# Altium PCB CH569W-R0-1v0.PcbDoc (part 3 of 4)
Units mil, origin at the board's own origin, x right, y up, seen from the top; angles counter-clockwise.
Board outline 3674 x 3156.46 mil, 4 copper layers (Top Layer, Mid-Layer 1, Mid-Layer 2, Bottom Layer); 78 components, 99 nets, 392 pads, 683 vias.
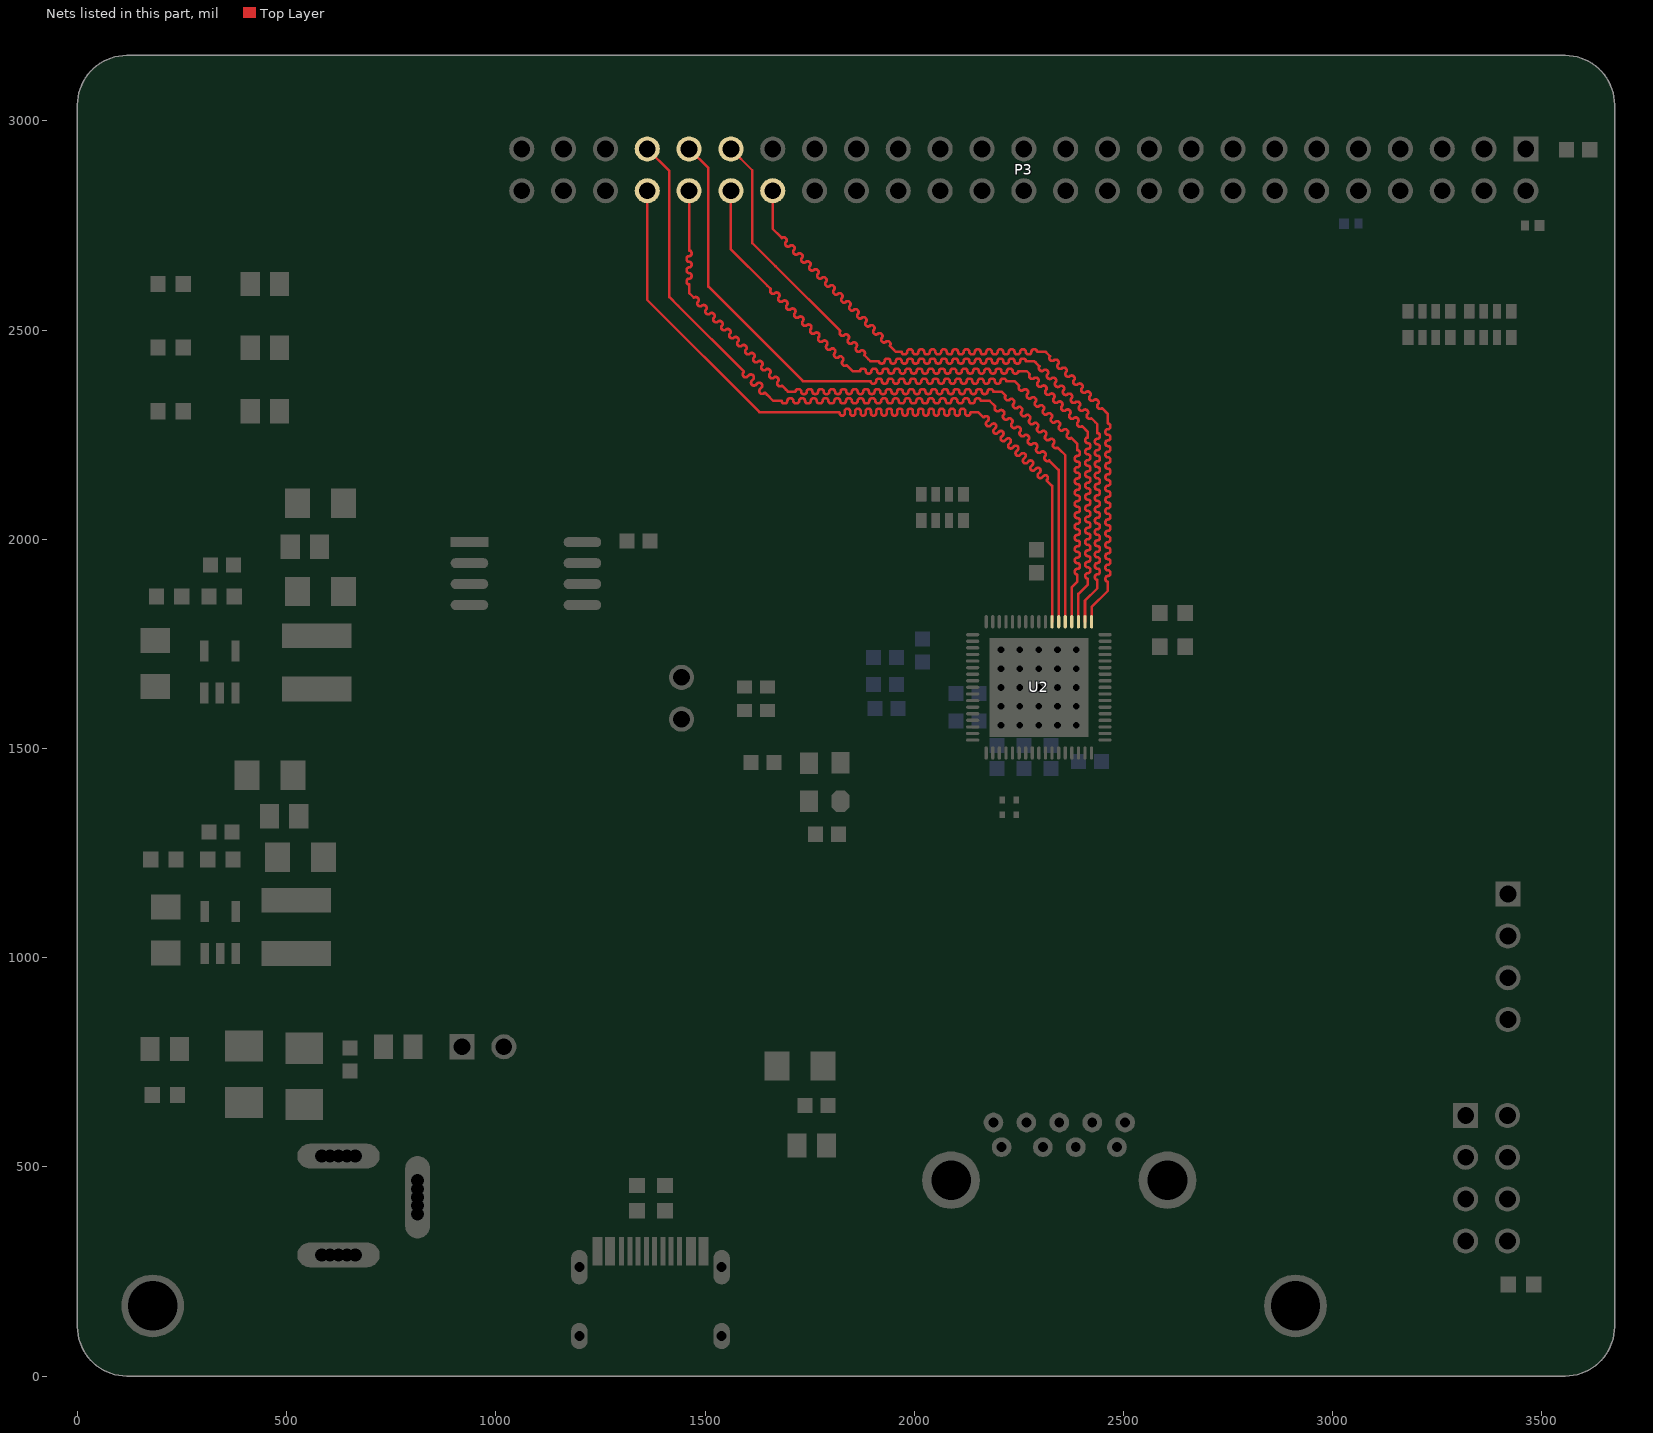
[diagram p5: the nets of this part, all layers, seen from the top]

## Via types
v1: diameter 17.72, hole 7.87, Top Layer to Bottom Layer, tented both sides, 350 vias
v2: diameter 28, hole 15, Top Layer to Bottom Layer, tented both sides, 141 vias
v3: diameter 28, hole 16, Top Layer to Bottom Layer, tented both sides, 104 vias
v4: diameter 24, hole 12, Top Layer to Bottom Layer, tented both sides, 85 vias
v5: diameter 30, hole 18, Top Layer to Bottom Layer, tented both sides, 3 vias

## Nets (pads, with @x,y where several pads share a name; then routed paths per layer and width w, separated by ;. In a path a pad name is that pad's centre, name@x,y a point inside that pad or via, vN(x,y) a via of type N, cw(c..) or ccw(c..) an arc to the next point about the centre after c; other vN are vias at no path point) (continued)
HD19: P3.38 U2.35 | length 2218
  Top Layer w6: P3.38@1662,2833 1662,2742 1680,2724 1683.94,2720.06 cw(c1688.18,2715.82) 1692.43,2720.06 1693.49,2719 cw(c1689.24,2714.76) 1693.49,2710.51 ccw(c1697.73,2706.27) 1693.49,2702.03 1694.55,2700.97 ccw(c1698.79,2705.21) 1703.03,2700.97 cw(c1707.28,2696.72) 1711.52,2700.97 1712.58,2699.91 cw(c1708.34,2695.66) 1712.58,2691.42 ccw(c1716.82,2687.18) 1712.58,2682.94 1713.64,2681.88 ccw(c1717.88,2686.12) 1722.12,2681.88 cw(c1726.37,2677.63) 1730.61,2681.88 1731.67,2680.81 cw(c1727.43,2676.57) 1731.67,2672.33 ccw(c1735.91,2668.09) 1731.67,2663.84 1732.73,2662.78 ccw(c1736.97,2667.03) 1741.22,2662.78 cw(c1745.46,2658.54) 1749.7,2662.78 1750.76,2661.72 cw(c1746.52,2657.48) 1750.76,2653.24 ccw(c1755,2649) 1750.76,2644.75 1751.82,2643.69 ccw(c1756.07,2647.93) 1760.31,2643.69 cw(c1764.55,2639.45) 1768.79,2643.69 1769.85,2642.63 cw(c1765.61,2638.39) 1769.85,2634.15 ccw(c1774.1,2629.9) 1769.85,2625.66 1770.91,2624.6 ccw(c1775.16,2628.84) 1779.4,2624.6 cw(c1783.64,2620.36) 1787.89,2624.6 1788.95,2623.54 cw(c1784.7,2619.3) 1788.95,2615.05 ccw(c1793.19,2610.81) 1788.95,2606.57 1790.01,2605.51 ccw(c1794.25,2609.75) 1798.49,2605.51 cw(c1802.73,2601.27) 1806.98,2605.51 1808.04,2604.45 cw(c1803.8,2600.2) 1808.04,2595.96 ccw(c1812.28,2591.72) 1808.04,2587.48 1809.1,2586.42 ccw(c1813.34,2590.66) 1817.58,2586.42 cw(c1821.83,2582.17) 1826.07,2586.42 1827.13,2585.36 cw(c1822.89,2581.11) 1827.13,2576.87 ccw(c1831.37,2572.63) 1827.13,2568.38 1828.19,2567.32 ccw(c1832.43,2571.57) 1836.68,2567.32 cw(c1840.92,2563.08) 1845.16,2567.32 1846.22,2566.26 cw(c1841.98,2562.02) 1846.22,2557.78 ccw(c1850.46,2553.54) 1846.22,2549.29 1847.28,2548.23 ccw(c1851.52,2552.48) 1855.77,2548.23 cw(c1860.01,2543.99) 1864.25,2548.23 1865.31,2547.17 cw(c1861.07,2542.93) 1865.31,2538.69 ccw(c1869.56,2534.44) 1865.31,2530.2 1866.37,2529.14 ccw(c1870.62,2533.38) 1874.86,2529.14 cw(c1879.1,2524.9) 1883.34,2529.14 1884.41,2528.08 cw(c1880.16,2523.84) 1884.41,2519.59 ccw(c1888.65,2515.35) 1884.41,2511.11 1885.47,2510.05 ccw(c1889.71,2514.29) 1893.95,2510.05 cw(c1898.19,2505.81) 1902.44,2510.05 1903.5,2508.99 cw(c1899.25,2504.75) 1903.5,2500.5 ccw(c1907.74,2496.26) 1903.5,2492.02 1904.56,2490.96 ccw(c1908.8,2495.2) 1913.04,2490.96 cw(c1917.29,2486.71) 1921.53,2490.96 1922.59,2489.9 cw(c1918.35,2485.65) 1922.59,2481.41 ccw(c1926.83,2477.17) 1922.59,2472.93 1923.65,2471.86 ccw(c1927.89,2476.11) 1932.14,2471.86 cw(c1936.38,2467.62) 1940.62,2471.86 1941.68,2470.8 cw(c1937.44,2466.56) 1941.68,2462.32 1951.23,2452.77 1956,2448 1956.25,2448 1969.75,2448 ccw(c1975.75,2448) 1975.75,2442 1977.25,2442 ccw(c1977.25,2448) 1983.25,2448 cw(c1989.25,2448) 1989.25,2454 1990.75,2454 cw(c1990.75,2448) 1996.75,2448 ccw(c2002.75,2448) 2002.75,2442 2004.25,2442 ccw(c2004.25,2448) 2010.25,2448 cw(c2016.25,2448) 2016.25,2454 2017.75,2454 cw(c2017.75,2448) 2023.75,2448 ccw(c2029.75,2448) 2029.75,2442 2031.25,2442 ccw(c2031.25,2448) 2037.25,2448 cw(c2043.25,2448) 2043.25,2454 2044.75,2454 cw(c2044.75,2448) 2050.75,2448 ccw(c2056.75,2448) 2056.75,2442 2058.25,2442 ccw(c2058.25,2448) 2064.25,2448 cw(c2070.25,2448) 2070.25,2454 2071.75,2454 cw(c2071.75,2448) 2077.75,2448 ccw(c2083.75,2448) 2083.75,2442 2085.25,2442 ccw(c2085.25,2448) 2091.25,2448 cw(c2097.25,2448) 2097.25,2454 2098.75,2454 cw(c2098.75,2448) 2104.75,2448 ccw(c2110.75,2448) 2110.75,2442 2112.25,2442 ccw(c2112.25,2448) 2118.25,2448 cw(c2124.25,2448) 2124.25,2454 2125.75,2454 cw(c2125.75,2448) 2131.75,2448 ccw(c2137.75,2448) 2137.75,2442 2139.25,2442 ccw(c2139.25,2448) 2145.25,2448 cw(c2151.25,2448) 2151.25,2454 2152.75,2454 cw(c2152.75,2448) 2158.75,2448 ccw(c2164.75,2448) 2164.75,2442 2166.25,2442 ccw(c2166.25,2448) 2172.25,2448 cw(c2178.25,2448) 2178.25,2454 2179.75,2454 cw(c2179.75,2448) 2185.75,2448 ccw(c2191.75,2448) 2191.75,2442 2193.25,2442 ccw(c2193.25,2448) 2199.25,2448 cw(c2205.25,2448) 2205.25,2454 2206.75,2454 cw(c2206.75,2448) 2212.75,2448 ccw(c2218.75,2448) 2218.75,2442 2220.25,2442 ccw(c2220.25,2448) 2226.25,2448 cw(c2232.25,2448) 2232.25,2454 2233.75,2454 cw(c2233.75,2448) 2239.75,2448 ccw(c2245.75,2448) 2245.75,2442 2247.25,2442 ccw(c2247.25,2448) 2253.25,2448 cw(c2259.25,2448) 2259.25,2454 2260.75,2454 cw(c2260.75,2448) 2266.75,2448 ccw(c2272.75,2448) 2272.75,2442 2274.25,2442 ccw(c2274.25,2448) 2280.25,2448 cw(c2286.25,2448) 2286.25,2454 2287.75,2454 cw(c2287.75,2448) 2293.75,2448 2307.25,2448 2314,2448 2315.04,2446.96 2324.58,2437.42 ccw(c2328.83,2433.17) 2324.58,2428.93 2325.64,2427.87 ccw(c2329.89,2432.11) 2334.13,2427.87 cw(c2338.37,2423.63) 2342.62,2427.87 2343.68,2426.81 cw(c2339.43,2422.57) 2343.68,2418.32 ccw(c2347.92,2414.08) 2343.68,2409.84 2344.74,2408.78 ccw(c2348.98,2413.02) 2353.22,2408.78 cw(c2357.46,2404.54) 2361.71,2408.78 2362.77,2407.72 cw(c2358.52,2403.48) 2362.77,2399.23 ccw(c2367.01,2394.99) 2362.77,2390.75 2363.83,2389.69 ccw(c2368.07,2393.93) 2372.31,2389.69 cw(c2376.56,2385.44) 2380.8,2389.69 2381.86,2388.63 cw(c2377.62,2384.38) 2381.86,2380.14 ccw(c2386.1,2375.9) 2381.86,2371.66 2382.92,2370.59 ccw(c2387.16,2374.84) 2391.41,2370.59 cw(c2395.65,2366.35) 2399.89,2370.59 2400.95,2369.53 cw(c2396.71,2365.29) 2400.95,2361.05 ccw(c2405.19,2356.81) 2400.95,2352.56 2402.01,2351.5 ccw(c2406.25,2355.75) 2410.5,2351.5 cw(c2414.74,2347.26) 2418.98,2351.5 2420.04,2350.44 cw(c2415.8,2346.2) 2420.04,2341.96 ccw(c2424.29,2337.71) 2420.04,2333.47 2421.1,2332.41 ccw(c2425.35,2336.65) 2429.59,2332.41 cw(c2433.83,2328.17) 2438.07,2332.41 2439.14,2331.35 cw(c2434.89,2327.11) 2439.14,2322.86 ccw(c2443.38,2318.62) 2439.14,2314.38 2440.2,2313.32 ccw(c2444.44,2317.56) 2448.68,2313.32 2458.23,2303.77 2463,2299 2463,2290.25 2463,2276.75 cw(c2463,2270.75) 2469,2270.75 2469,2269.25 cw(c2463,2269.25) 2463,2263.25 ccw(c2463,2257.25) 2457,2257.25 2457,2255.75 ccw(c2463,2255.75) 2463,2249.75 cw(c2463,2243.75) 2469,2243.75 2469,2242.25 cw(c2463,2242.25) 2463,2236.25 ccw(c2463,2230.25) 2457,2230.25 2457,2228.75 ccw(c2463,2228.75) 2463,2222.75 cw(c2463,2216.75) 2469,2216.75 2469,2215.25 cw(c2463,2215.25) 2463,2209.25 ccw(c2463,2203.25) 2457,2203.25 2457,2201.75 ccw(c2463,2201.75) 2463,2195.75 cw(c2463,2189.75) 2469,2189.75 2469,2188.25 cw(c2463,2188.25) 2463,2182.25 ccw(c2463,2176.25) 2457,2176.25 2457,2174.75 ccw(c2463,2174.75) 2463,2168.75 cw(c2463,2162.75) 2469,2162.75 2469,2161.25 cw(c2463,2161.25) 2463,2155.25 ccw(c2463,2149.25) 2457,2149.25 2457,2147.75 ccw(c2463,2147.75) 2463,2141.75 cw(c2463,2135.75) 2469,2135.75 2469,2134.25 cw(c2463,2134.25) 2463,2128.25 ccw(c2463,2122.25) 2457,2122.25 2457,2120.75 ccw(c2463,2120.75) 2463,2114.75 cw(c2463,2108.75) 2469,2108.75 2469,2107.25 cw(c2463,2107.25) 2463,2101.25 ccw(c2463,2095.25) 2457,2095.25 2457,2093.75 ccw(c2463,2093.75) 2463,2087.75 cw(c2463,2081.75) 2469,2081.75 2469,2080.25 cw(c2463,2080.25) 2463,2074.25 ccw(c2463,2068.25) 2457,2068.25 2457,2066.75 ccw(c2463,2066.75) 2463,2060.75 cw(c2463,2054.75) 2469,2054.75 2469,2053.25 cw(c2463,2053.25) 2463,2047.25 ccw(c2463,2041.25) 2457,2041.25 2457,2039.75 ccw(c2463,2039.75) 2463,2033.75 cw(c2463,2027.75) 2469,2027.75 2469,2026.25 cw(c2463,2026.25) 2463,2020.25 ccw(c2463,2014.25) 2457,2014.25 2457,2012.75 ccw(c2463,2012.75) 2463,2006.75 cw(c2463,2000.75) 2469,2000.75 2469,1999.25 cw(c2463,1999.25) 2463,1993.25 ccw(c2463,1987.25) 2457,1987.25 2457,1985.75 ccw(c2463,1985.75) 2463,1979.75 cw(c2463,1973.75) 2469,1973.75 2469,1972.25 cw(c2463,1972.25) 2463,1966.25 ccw(c2463,1960.25) 2457,1960.25 2457,1958.75 ccw(c2463,1958.75) 2463,1952.75 cw(c2463,1946.75) 2469,1946.75 2469,1945.25 cw(c2463,1945.25) 2463,1939.25 ccw(c2463,1933.25) 2457,1933.25 2457,1931.75 ccw(c2463,1931.75) 2463,1925.75 cw(c2463,1919.75) 2469,1919.75 2469,1918.25 cw(c2463,1918.25) 2463,1912.25 ccw(c2463,1906.25) 2457,1906.25 2457,1904.75 ccw(c2463,1904.75) 2463,1898.75 2463,1892 2463,1877 2423.98,1837.98 U2.35@2423.98,1802.78
HD20: P3.39 U2.36 | length 2221.3
  Top Layer w6: P3.39@1562,2933 1613,2882 1613,2708 1668.5,2652.5 1823.41,2497.59 ccw(c1827.65,2493.35) 1823.41,2489.11 1824.47,2488.05 ccw(c1828.71,2492.29) 1832.95,2488.05 cw(c1837.19,2483.81) 1841.44,2488.05 1842.5,2486.99 cw(c1838.25,2482.75) 1842.5,2478.5 ccw(c1846.74,2474.26) 1842.5,2470.02 1843.56,2468.96 ccw(c1847.8,2473.2) 1852.04,2468.96 cw(c1856.29,2464.71) 1860.53,2468.96 1861.59,2467.9 cw(c1857.35,2463.65) 1861.59,2459.41 ccw(c1865.83,2455.17) 1861.59,2450.93 1862.65,2449.86 ccw(c1866.89,2454.11) 1871.14,2449.86 cw(c1875.38,2445.62) 1879.62,2449.86 1880.68,2448.8 cw(c1876.44,2444.56) 1880.68,2440.32 1890.23,2430.77 1895,2426 1902.25,2426 1915.75,2426 ccw(c1921.75,2426) 1921.75,2420 1923.25,2420 ccw(c1923.25,2426) 1929.25,2426 cw(c1935.25,2426) 1935.25,2432 1936.75,2432 cw(c1936.75,2426) 1942.75,2426 ccw(c1948.75,2426) 1948.75,2420 1950.25,2420 ccw(c1950.25,2426) 1956.25,2426 cw(c1962.25,2426) 1962.25,2432 1963.75,2432 cw(c1963.75,2426) 1969.75,2426 ccw(c1975.75,2426) 1975.75,2420 1977.25,2420 ccw(c1977.25,2426) 1983.25,2426 cw(c1989.25,2426) 1989.25,2432 1990.75,2432 cw(c1990.75,2426) 1996.75,2426 ccw(c2002.75,2426) 2002.75,2420 2004.25,2420 ccw(c2004.25,2426) 2010.25,2426 cw(c2016.25,2426) 2016.25,2432 2017.75,2432 cw(c2017.75,2426) 2023.75,2426 ccw(c2029.75,2426) 2029.75,2420 2031.25,2420 ccw(c2031.25,2426) 2037.25,2426 cw(c2043.25,2426) 2043.25,2432 2044.75,2432 cw(c2044.75,2426) 2050.75,2426 ccw(c2056.75,2426) 2056.75,2420 2058.25,2420 ccw(c2058.25,2426) 2064.25,2426 cw(c2070.25,2426) 2070.25,2432 2071.75,2432 cw(c2071.75,2426) 2077.75,2426 ccw(c2083.75,2426) 2083.75,2420 2085.25,2420 ccw(c2085.25,2426) 2091.25,2426 cw(c2097.25,2426) 2097.25,2432 2098.75,2432 cw(c2098.75,2426) 2104.75,2426 ccw(c2110.75,2426) 2110.75,2420 2112.25,2420 ccw(c2112.25,2426) 2118.25,2426 cw(c2124.25,2426) 2124.25,2432 2125.75,2432 cw(c2125.75,2426) 2131.75,2426 ccw(c2137.75,2426) 2137.75,2420 2139.25,2420 ccw(c2139.25,2426) 2145.25,2426 cw(c2151.25,2426) 2151.25,2432 2152.75,2432 cw(c2152.75,2426) 2158.75,2426 ccw(c2164.75,2426) 2164.75,2420 2166.25,2420 ccw(c2166.25,2426) 2172.25,2426 cw(c2178.25,2426) 2178.25,2432 2179.75,2432 cw(c2179.75,2426) 2185.75,2426 ccw(c2191.75,2426) 2191.75,2420 2193.25,2420 ccw(c2193.25,2426) 2199.25,2426 cw(c2205.25,2426) 2205.25,2432 2206.75,2432 cw(c2206.75,2426) 2212.75,2426 ccw(c2218.75,2426) 2218.75,2420 2220.25,2420 ccw(c2220.25,2426) 2226.25,2426 cw(c2232.25,2426) 2232.25,2432 2233.75,2432 cw(c2233.75,2426) 2239.75,2426 ccw(c2245.75,2426) 2245.75,2420 2247.25,2420 ccw(c2247.25,2426) 2253.25,2426 cw(c2259.25,2426) 2259.25,2432 2260.75,2432 cw(c2260.75,2426) 2266.75,2426 2280.25,2426 2287,2426 2290.04,2422.96 2299.58,2413.42 ccw(c2303.83,2409.17) 2299.58,2404.93 2300.64,2403.87 ccw(c2304.89,2408.11) 2309.13,2403.87 cw(c2313.37,2399.63) 2317.62,2403.87 2318.68,2402.81 cw(c2314.43,2398.57) 2318.68,2394.32 ccw(c2322.92,2390.08) 2318.68,2385.84 2319.74,2384.78 ccw(c2323.98,2389.02) 2328.22,2384.78 cw(c2332.46,2380.54) 2336.71,2384.78 2337.77,2383.72 cw(c2333.52,2379.48) 2337.77,2375.23 ccw(c2342.01,2370.99) 2337.77,2366.75 2338.83,2365.69 ccw(c2343.07,2369.93) 2347.31,2365.69 cw(c2351.56,2361.44) 2355.8,2365.69 2356.86,2364.63 cw(c2352.62,2360.38) 2356.86,2356.14 ccw(c2361.1,2351.9) 2356.86,2347.66 2357.92,2346.59 ccw(c2362.16,2350.84) 2366.41,2346.59 cw(c2370.65,2342.35) 2374.89,2346.59 2375.95,2345.53 cw(c2371.71,2341.29) 2375.95,2337.05 ccw(c2380.19,2332.81) 2375.95,2328.56 2377.01,2327.5 ccw(c2381.25,2331.75) 2385.5,2327.5 cw(c2389.74,2323.26) 2393.98,2327.5 2395.04,2326.44 cw(c2390.8,2322.2) 2395.04,2317.96 ccw(c2399.29,2313.71) 2395.04,2309.47 2396.1,2308.41 ccw(c2400.35,2312.65) 2404.59,2308.41 cw(c2408.83,2304.17) 2413.07,2308.41 2414.14,2307.35 cw(c2409.89,2303.11) 2414.14,2298.86 ccw(c2418.38,2294.62) 2414.14,2290.38 2415.2,2289.32 ccw(c2419.44,2293.56) 2423.68,2289.32 2433.23,2279.77 2438,2275 2438,2267.25 2438,2253.75 cw(c2438,2247.75) 2444,2247.75 2444,2246.25 cw(c2438,2246.25) 2438,2240.25 ccw(c2438,2234.25) 2432,2234.25 2432,2232.75 ccw(c2438,2232.75) 2438,2226.75 cw(c2438,2220.75) 2444,2220.75 2444,2219.25 cw(c2438,2219.25) 2438,2213.25 ccw(c2438,2207.25) 2432,2207.25 2432,2205.75 ccw(c2438,2205.75) 2438,2199.75 cw(c2438,2193.75) 2444,2193.75 2444,2192.25 cw(c2438,2192.25) 2438,2186.25 ccw(c2438,2180.25) 2432,2180.25 2432,2178.75 ccw(c2438,2178.75) 2438,2172.75 cw(c2438,2166.75) 2444,2166.75 2444,2165.25 cw(c2438,2165.25) 2438,2159.25 ccw(c2438,2153.25) 2432,2153.25 2432,2151.75 ccw(c2438,2151.75) 2438,2145.75 cw(c2438,2139.75) 2444,2139.75 2444,2138.25 cw(c2438,2138.25) 2438,2132.25 ccw(c2438,2126.25) 2432,2126.25 2432,2124.75 ccw(c2438,2124.75) 2438,2118.75 cw(c2438,2112.75) 2444,2112.75 2444,2111.25 cw(c2438,2111.25) 2438,2105.25 ccw(c2438,2099.25) 2432,2099.25 2432,2097.75 ccw(c2438,2097.75) 2438,2091.75 cw(c2438,2085.75) 2444,2085.75 2444,2084.25 cw(c2438,2084.25) 2438,2078.25 ccw(c2438,2072.25) 2432,2072.25 2432,2070.75 ccw(c2438,2070.75) 2438,2064.75 cw(c2438,2058.75) 2444,2058.75 2444,2057.25 cw(c2438,2057.25) 2438,2051.25 ccw(c2438,2045.25) 2432,2045.25 2432,2043.75 ccw(c2438,2043.75) 2438,2037.75 cw(c2438,2031.75) 2444,2031.75 2444,2030.25 cw(c2438,2030.25) 2438,2024.25 ccw(c2438,2018.25) 2432,2018.25 2432,2016.75 ccw(c2438,2016.75) 2438,2010.75 cw(c2438,2004.75) 2444,2004.75 2444,2003.25 cw(c2438,2003.25) 2438,1997.25 ccw(c2438,1991.25) 2432,1991.25 2432,1989.75 ccw(c2438,1989.75) 2438,1983.75 cw(c2438,1977.75) 2444,1977.75 2444,1976.25 cw(c2438,1976.25) 2438,1970.25 ccw(c2438,1964.25) 2432,1964.25 2432,1962.75 ccw(c2438,1962.75) 2438,1956.75 cw(c2438,1950.75) 2444,1950.75 2444,1949.25 cw(c2438,1949.25) 2438,1943.25 ccw(c2438,1937.25) 2432,1937.25 2432,1935.75 ccw(c2438,1935.75) 2438,1929.75 cw(c2438,1923.75) 2444,1923.75 2444,1922.25 cw(c2438,1922.25) 2438,1916.25 ccw(c2438,1910.25) 2432,1910.25 2432,1908.75 ccw(c2438,1908.75) 2438,1902.75 2438,1896 2438,1883 2408.24,1853.24 U2.36@2408.24,1802.78
HD21: P3.40 U2.37 | length 2218.8
  Top Layer w6: P3.40@1562,2833 1562,2693 1649,2606 1657.31,2597.69 ccw(c1661.55,2593.45) 1657.31,2589.21 1658.37,2588.15 ccw(c1662.61,2592.39) 1666.85,2588.15 cw(c1671.1,2583.9) 1675.34,2588.15 1676.4,2587.09 cw(c1672.16,2582.84) 1676.4,2578.6 ccw(c1680.64,2574.36) 1676.4,2570.11 1677.46,2569.05 ccw(c1681.7,2573.3) 1685.95,2569.05 cw(c1690.19,2564.81) 1694.43,2569.05 1695.49,2567.99 cw(c1691.25,2563.75) 1695.49,2559.51 ccw(c1699.73,2555.27) 1695.49,2551.02 1696.55,2549.96 ccw(c1700.8,2554.2) 1705.04,2549.96 cw(c1709.28,2545.72) 1713.52,2549.96 1714.58,2548.9 cw(c1710.34,2544.66) 1714.58,2540.42 ccw(c1718.83,2536.17) 1714.58,2531.93 1715.64,2530.87 ccw(c1719.89,2535.11) 1724.13,2530.87 cw(c1728.37,2526.63) 1732.62,2530.87 1733.68,2529.81 cw(c1729.43,2525.57) 1733.68,2521.32 ccw(c1737.92,2517.08) 1733.68,2512.84 1734.74,2511.78 ccw(c1738.98,2516.02) 1743.22,2511.78 cw(c1747.46,2507.54) 1751.71,2511.78 1752.77,2510.72 cw(c1748.53,2506.48) 1752.77,2502.23 ccw(c1757.01,2497.99) 1752.77,2493.75 1753.83,2492.69 ccw(c1758.07,2496.93) 1762.31,2492.69 cw(c1766.56,2488.44) 1770.8,2492.69 1771.86,2491.63 cw(c1767.62,2487.38) 1771.86,2483.14 ccw(c1776.1,2478.9) 1771.86,2474.66 1772.92,2473.59 ccw(c1777.16,2477.84) 1781.41,2473.59 cw(c1785.65,2469.35) 1789.89,2473.59 1790.95,2472.53 cw(c1786.71,2468.29) 1790.95,2464.05 ccw(c1795.19,2459.81) 1790.95,2455.56 1792.01,2454.5 ccw(c1796.25,2458.75) 1800.5,2454.5 cw(c1804.74,2450.26) 1808.98,2454.5 1810.04,2453.44 cw(c1805.8,2449.2) 1810.04,2444.96 ccw(c1814.29,2440.71) 1810.04,2436.47 1811.1,2435.41 ccw(c1815.35,2439.65) 1819.59,2435.41 cw(c1823.83,2431.17) 1828.07,2435.41 1829.14,2434.35 cw(c1824.89,2430.11) 1829.14,2425.86 ccw(c1833.38,2421.62) 1829.14,2417.38 1830.2,2416.32 ccw(c1834.44,2420.56) 1838.68,2416.32 1848.23,2406.77 1853,2402 1857.25,2402 1870.75,2402 cw(c1876.75,2402) 1876.75,2408 1878.25,2408 cw(c1878.25,2402) 1884.25,2402 ccw(c1890.25,2402) 1890.25,2396 1891.75,2396 ccw(c1891.75,2402) 1897.75,2402 cw(c1903.75,2402) 1903.75,2408 1905.25,2408 cw(c1905.25,2402) 1911.25,2402 ccw(c1917.25,2402) 1917.25,2396 1918.75,2396 ccw(c1918.75,2402) 1924.75,2402 cw(c1930.75,2402) 1930.75,2408 1932.25,2408 cw(c1932.25,2402) 1938.25,2402 ccw(c1944.25,2402) 1944.25,2396 1945.75,2396 ccw(c1945.75,2402) 1951.75,2402 cw(c1957.75,2402) 1957.75,2408 1959.25,2408 cw(c1959.25,2402) 1965.25,2402 ccw(c1971.25,2402) 1971.25,2396 1972.75,2396 ccw(c1972.75,2402) 1978.75,2402 cw(c1984.75,2402) 1984.75,2408 1986.25,2408 cw(c1986.25,2402) 1992.25,2402 ccw(c1998.25,2402) 1998.25,2396 1999.75,2396 ccw(c1999.75,2402) 2005.75,2402 cw(c2011.75,2402) 2011.75,2408 2013.25,2408 cw(c2013.25,2402) 2019.25,2402 ccw(c2025.25,2402) 2025.25,2396 2026.75,2396 ccw(c2026.75,2402) 2032.75,2402 cw(c2038.75,2402) 2038.75,2408 2040.25,2408 cw(c2040.25,2402) 2046.25,2402 ccw(c2052.25,2402) 2052.25,2396 2053.75,2396 ccw(c2053.75,2402) 2059.75,2402 cw(c2065.75,2402) 2065.75,2408 2067.25,2408 cw(c2067.25,2402) 2073.25,2402 ccw(c2079.25,2402) 2079.25,2396 2080.75,2396 ccw(c2080.75,2402) 2086.75,2402 cw(c2092.75,2402) 2092.75,2408 2094.25,2408 cw(c2094.25,2402) 2100.25,2402 ccw(c2106.25,2402) 2106.25,2396 2107.75,2396 ccw(c2107.75,2402) 2113.75,2402 cw(c2119.75,2402) 2119.75,2408 2121.25,2408 cw(c2121.25,2402) 2127.25,2402 ccw(c2133.25,2402) 2133.25,2396 2134.75,2396 ccw(c2134.75,2402) 2140.75,2402 cw(c2146.75,2402) 2146.75,2408 2148.25,2408 cw(c2148.25,2402) 2154.25,2402 ccw(c2160.25,2402) 2160.25,2396 2161.75,2396 ccw(c2161.75,2402) 2167.75,2402 cw(c2173.75,2402) 2173.75,2408 2175.25,2408 cw(c2175.25,2402) 2181.25,2402 ccw(c2187.25,2402) 2187.25,2396 2188.75,2396 ccw(c2188.75,2402) 2194.75,2402 cw(c2200.75,2402) 2200.75,2408 2202.25,2408 cw(c2202.25,2402) 2208.25,2402 ccw(c2214.25,2402) 2214.25,2396 2215.75,2396 ccw(c2215.75,2402) 2221.75,2402 cw(c2227.75,2402) 2227.75,2408 2229.25,2408 cw(c2229.25,2402) 2235.25,2402 ccw(c2241.25,2402) 2241.25,2396 2242.75,2396 ccw(c2242.75,2402) 2248.75,2402 2262.25,2402 2269,2402 2276.58,2394.42 ccw(c2280.83,2390.17) 2276.58,2385.93 2277.64,2384.87 ccw(c2281.89,2389.11) 2286.13,2384.87 cw(c2290.37,2380.63) 2294.62,2384.87 2295.68,2383.81 cw(c2291.43,2379.57) 2295.68,2375.32 ccw(c2299.92,2371.08) 2295.68,2366.84 2296.74,2365.78 ccw(c2300.98,2370.02) 2305.22,2365.78 cw(c2309.46,2361.54) 2313.71,2365.78 2314.77,2364.72 cw(c2310.52,2360.47) 2314.77,2356.23 ccw(c2319.01,2351.99) 2314.77,2347.75 2315.83,2346.69 ccw(c2320.07,2350.93) 2324.31,2346.69 cw(c2328.56,2342.44) 2332.8,2346.69 2333.86,2345.63 cw(c2329.62,2341.38) 2333.86,2337.14 ccw(c2338.1,2332.9) 2333.86,2328.66 2334.92,2327.59 ccw(c2339.16,2331.84) 2343.41,2327.59 cw(c2347.65,2323.35) 2351.89,2327.59 2352.95,2326.53 cw(c2348.71,2322.29) 2352.95,2318.05 ccw(c2357.19,2313.81) 2352.95,2309.56 2354.01,2308.5 ccw(c2358.25,2312.75) 2362.5,2308.5 cw(c2366.74,2304.26) 2370.98,2308.5 2372.04,2307.44 cw(c2367.8,2303.2) 2372.04,2298.96 ccw(c2376.29,2294.71) 2372.04,2290.47 2373.1,2289.41 ccw(c2377.35,2293.65) 2381.59,2289.41 cw(c2385.83,2285.17) 2390.07,2289.41 2391.14,2288.35 cw(c2386.89,2284.11) 2391.14,2279.86 ccw(c2395.38,2275.62) 2391.14,2271.38 2392.2,2270.32 ccw(c2396.44,2274.56) 2400.68,2270.32 2410.23,2260.77 2415,2256 2415,2243.25 ccw(c2415,2237.25) 2409,2237.25 2409,2235.75 ccw(c2415,2235.75) 2415,2229.75 cw(c2415,2223.75) 2421,2223.75 2421,2222.25 cw(c2415,2222.25) 2415,2216.25 ccw(c2415,2210.25) 2409,2210.25 2409,2208.75 ccw(c2415,2208.75) 2415,2202.75 cw(c2415,2196.75) 2421,2196.75 2421,2195.25 cw(c2415,2195.25) 2415,2189.25 ccw(c2415,2183.25) 2409,2183.25 2409,2181.75 ccw(c2415,2181.75) 2415,2175.75 cw(c2415,2169.75) 2421,2169.75 2421,2168.25 cw(c2415,2168.25) 2415,2162.25 ccw(c2415,2156.25) 2409,2156.25 2409,2154.75 ccw(c2415,2154.75) 2415,2148.75 cw(c2415,2142.75) 2421,2142.75 2421,2141.25 cw(c2415,2141.25) 2415,2135.25 ccw(c2415,2129.25) 2409,2129.25 2409,2127.75 ccw(c2415,2127.75) 2415,2121.75 cw(c2415,2115.75) 2421,2115.75 2421,2114.25 cw(c2415,2114.25) 2415,2108.25 ccw(c2415,2102.25) 2409,2102.25 2409,2100.75 ccw(c2415,2100.75) 2415,2094.75 cw(c2415,2088.75) 2421,2088.75 2421,2087.25 cw(c2415,2087.25) 2415,2081.25 ccw(c2415,2075.25) 2409,2075.25 2409,2073.75 ccw(c2415,2073.75) 2415,2067.75 cw(c2415,2061.75) 2421,2061.75 2421,2060.25 cw(c2415,2060.25) 2415,2054.25 ccw(c2415,2048.25) 2409,2048.25 2409,2046.75 ccw(c2415,2046.75) 2415,2040.75 cw(c2415,2034.75) 2421,2034.75 2421,2033.25 cw(c2415,2033.25) 2415,2027.25 ccw(c2415,2021.25) 2409,2021.25 2409,2019.75 ccw(c2415,2019.75) 2415,2013.75 cw(c2415,2007.75) 2421,2007.75 2421,2006.25 cw(c2415,2006.25) 2415,2000.25 ccw(c2415,1994.25) 2409,1994.25 2409,1992.75 ccw(c2415,1992.75) 2415,1986.75 cw(c2415,1980.75) 2421,1980.75 2421,1979.25 cw(c2415,1979.25) 2415,1973.25 ccw(c2415,1967.25) 2409,1967.25 2409,1965.75 ccw(c2415,1965.75) 2415,1959.75 cw(c2415,1953.75) 2421,1953.75 2421,1952.25 cw(c2415,1952.25) 2415,1946.25 ccw(c2415,1940.25) 2409,1940.25 2409,1938.75 ccw(c2415,1938.75) 2415,1932.75 cw(c2415,1926.75) 2421,1926.75 2421,1925.25 cw(c2415,1925.25) 2415,1919.25 ccw(c2415,1913.25) 2409,1913.25 2409,1911.75 ccw(c2415,1911.75) 2415,1905.75 2415,1899 2415,1892 2392.49,1869.49 U2.37@2392.49,1802.78
HD22: P3.41 U2.38 | length 2220.6
  Top Layer w6: P3.41@1462,2933 1508,2887 1508,2604 1734,2378 1885,2378 1895.75,2378 ccw(c1901.75,2378) 1901.75,2372 1903.25,2372 ccw(c1903.25,2378) 1909.25,2378 cw(c1915.25,2378) 1915.25,2384 1916.75,2384 cw(c1916.75,2378) 1922.75,2378 ccw(c1928.75,2378) 1928.75,2372 1930.25,2372 ccw(c1930.25,2378) 1936.25,2378 cw(c1942.25,2378) 1942.25,2384 1943.75,2384 cw(c1943.75,2378) 1949.75,2378 ccw(c1955.75,2378) 1955.75,2372 1957.25,2372 ccw(c1957.25,2378) 1963.25,2378 cw(c1969.25,2378) 1969.25,2384 1970.75,2384 cw(c1970.75,2378) 1976.75,2378 ccw(c1982.75,2378) 1982.75,2372 1984.25,2372 ccw(c1984.25,2378) 1990.25,2378 cw(c1996.25,2378) 1996.25,2384 1997.75,2384 cw(c1997.75,2378) 2003.75,2378 ccw(c2009.75,2378) 2009.75,2372 2011.25,2372 ccw(c2011.25,2378) 2017.25,2378 cw(c2023.25,2378) 2023.25,2384 2024.75,2384 cw(c2024.75,2378) 2030.75,2378 ccw(c2036.75,2378) 2036.75,2372 2038.25,2372 ccw(c2038.25,2378) 2044.25,2378 cw(c2050.25,2378) 2050.25,2384 2051.75,2384 cw(c2051.75,2378) 2057.75,2378 ccw(c2063.75,2378) 2063.75,2372 2065.25,2372 ccw(c2065.25,2378) 2071.25,2378 cw(c2077.25,2378) 2077.25,2384 2078.75,2384 cw(c2078.75,2378) 2084.75,2378 ccw(c2090.75,2378) 2090.75,2372 2092.25,2372 ccw(c2092.25,2378) 2098.25,2378 cw(c2104.25,2378) 2104.25,2384 2105.75,2384 cw(c2105.75,2378) 2111.75,2378 ccw(c2117.75,2378) 2117.75,2372 2119.25,2372 ccw(c2119.25,2378) 2125.25,2378 cw(c2131.25,2378) 2131.25,2384 2132.75,2384 cw(c2132.75,2378) 2138.75,2378 ccw(c2144.75,2378) 2144.75,2372 2146.25,2372 ccw(c2146.25,2378) 2152.25,2378 cw(c2158.25,2378) 2158.25,2384 2159.75,2384 cw(c2159.75,2378) 2165.75,2378 ccw(c2171.75,2378) 2171.75,2372 2173.25,2372 ccw(c2173.25,2378) 2179.25,2378 cw(c2185.25,2378) 2185.25,2384 2186.75,2384 cw(c2186.75,2378) 2192.75,2378 ccw(c2198.75,2378) 2198.75,2372 2200.25,2372 ccw(c2200.25,2378) 2206.25,2378 cw(c2212.25,2378) 2212.25,2384 2213.75,2384 cw(c2213.75,2378) 2219.75,2378 2233.25,2378 2240,2378 2242.04,2375.96 2251.58,2366.42 ccw(c2255.83,2362.17) 2251.58,2357.93 2252.64,2356.87 ccw(c2256.89,2361.11) 2261.13,2356.87 cw(c2265.37,2352.63) 2269.62,2356.87 2270.68,2355.81 cw(c2266.43,2351.57) 2270.68,2347.32 ccw(c2274.92,2343.08) 2270.68,2338.84 2271.74,2337.78 ccw(c2275.98,2342.02) 2280.22,2337.78 cw(c2284.46,2333.54) 2288.71,2337.78 2289.77,2336.72 cw(c2285.52,2332.47) 2289.77,2328.23 ccw(c2294.01,2323.99) 2289.77,2319.75 2290.83,2318.69 ccw(c2295.07,2322.93) 2299.31,2318.69 cw(c2303.56,2314.44) 2307.8,2318.69 2308.86,2317.63 cw(c2304.62,2313.38) 2308.86,2309.14 ccw(c2313.1,2304.9) 2308.86,2300.66 2309.92,2299.59 ccw(c2314.16,2303.84) 2318.41,2299.59 cw(c2322.65,2295.35) 2326.89,2299.59 2327.95,2298.53 cw(c2323.71,2294.29) 2327.95,2290.05 ccw(c2332.19,2285.81) 2327.95,2281.56 2329.01,2280.5 ccw(c2333.25,2284.75) 2337.5,2280.5 cw(c2341.74,2276.26) 2345.98,2280.5 2347.04,2279.44 cw(c2342.8,2275.2) 2347.04,2270.96 ccw(c2351.29,2266.71) 2347.04,2262.47 2348.1,2261.41 ccw(c2352.35,2265.65) 2356.59,2261.41 cw(c2360.83,2257.17) 2365.07,2261.41 2366.14,2260.35 cw(c2361.89,2256.11) 2366.14,2251.86 ccw(c2370.38,2247.62) 2366.14,2243.38 2367.2,2242.32 ccw(c2371.44,2246.56) 2375.68,2242.32 2385.23,2232.77 2390,2228 2390,2226.25 2390,2212.75 cw(c2390,2206.75) 2396,2206.75 2396,2205.25 cw(c2390,2205.25) 2390,2199.25 ccw(c2390,2193.25) 2384,2193.25 2384,2191.75 ccw(c2390,2191.75) 2390,2185.75 cw(c2390,2179.75) 2396,2179.75 2396,2178.25 cw(c2390,2178.25) 2390,2172.25 ccw(c2390,2166.25) 2384,2166.25 2384,2164.75 ccw(c2390,2164.75) 2390,2158.75 cw(c2390,2152.75) 2396,2152.75 2396,2151.25 cw(c2390,2151.25) 2390,2145.25 ccw(c2390,2139.25) 2384,2139.25 2384,2137.75 ccw(c2390,2137.75) 2390,2131.75 cw(c2390,2125.75) 2396,2125.75 2396,2124.25 cw(c2390,2124.25) 2390,2118.25 ccw(c2390,2112.25) 2384,2112.25 2384,2110.75 ccw(c2390,2110.75) 2390,2104.75 cw(c2390,2098.75) 2396,2098.75 2396,2097.25 cw(c2390,2097.25) 2390,2091.25 ccw(c2390,2085.25) 2384,2085.25 2384,2083.75 ccw(c2390,2083.75) 2390,2077.75 cw(c2390,2071.75) 2396,2071.75 2396,2070.25 cw(c2390,2070.25) 2390,2064.25 ccw(c2390,2058.25) 2384,2058.25 2384,2056.75 ccw(c2390,2056.75) 2390,2050.75 cw(c2390,2044.75) 2396,2044.75 2396,2043.25 cw(c2390,2043.25) 2390,2037.25 ccw(c2390,2031.25) 2384,2031.25 2384,2029.75 ccw(c2390,2029.75) 2390,2023.75 cw(c2390,2017.75) 2396,2017.75 2396,2016.25 cw(c2390,2016.25) 2390,2010.25 ccw(c2390,2004.25) 2384,2004.25 2384,2002.75 ccw(c2390,2002.75) 2390,1996.75 cw(c2390,1990.75) 2396,1990.75 2396,1989.25 cw(c2390,1989.25) 2390,1983.25 ccw(c2390,1977.25) 2384,1977.25 2384,1975.75 ccw(c2390,1975.75) 2390,1969.75 cw(c2390,1963.75) 2396,1963.75 2396,1962.25 cw(c2390,1962.25) 2390,1956.25 ccw(c2390,1950.25) 2384,1950.25 2384,1948.75 ccw(c2390,1948.75) 2390,1942.75 cw(c2390,1936.75) 2396,1936.75 2396,1935.25 cw(c2390,1935.25) 2390,1929.25 ccw(c2390,1923.25) 2384,1923.25 2384,1921.75 ccw(c2390,1921.75) 2390,1915.75 2390,1909 2390,1899 2376.74,1885.74 U2.38@2376.74,1802.78
HD23: P3.42 U2.39 | length 2222.5
  Top Layer w6: P3.42@1462,2833 1462,2693 1462,2690.25 cw(c1462,2684.25) 1468,2684.25 1468,2682.75 cw(c1462,2682.75) 1462,2676.75 ccw(c1462,2670.75) 1456,2670.75 1456,2669.25 ccw(c1462,2669.25) 1462,2663.25 cw(c1462,2657.25) 1468,2657.25 1468,2655.75 cw(c1462,2655.75) 1462,2649.75 ccw(c1462,2643.75) 1456,2643.75 1456,2642.25 ccw(c1462,2642.25) 1462,2636.25 cw(c1462,2630.25) 1468,2630.25 1468,2628.75 cw(c1462,2628.75) 1462,2622.75 ccw(c1462,2616.75) 1456,2616.75 1456,2615.25 ccw(c1462,2615.25) 1462,2609.25 1462,2595.75 1462,2589 1464.12,2586.88 1473.67,2577.33 cw(c1477.91,2573.09) 1482.16,2577.33 1483.22,2576.27 cw(c1478.97,2572.03) 1483.22,2567.78 ccw(c1487.46,2563.54) 1483.22,2559.3 1484.28,2558.24 ccw(c1488.52,2562.48) 1492.76,2558.24 cw(c1497,2554) 1501.25,2558.24 1502.31,2557.18 cw(c1498.07,2552.93) 1502.31,2548.69 ccw(c1506.55,2544.45) 1502.31,2540.21 1503.37,2539.15 ccw(c1507.61,2543.39) 1511.85,2539.15 cw(c1516.1,2534.9) 1520.34,2539.15 1521.4,2538.09 cw(c1517.16,2533.84) 1521.4,2529.6 ccw(c1525.64,2525.36) 1521.4,2521.11 1522.46,2520.05 ccw(c1526.7,2524.3) 1530.95,2520.05 cw(c1535.19,2515.81) 1539.43,2520.05 1540.49,2518.99 cw(c1536.25,2514.75) 1540.49,2510.51 ccw(c1544.73,2506.27) 1540.49,2502.02 1541.55,2500.96 ccw(c1545.8,2505.2) 1550.04,2500.96 cw(c1554.28,2496.72) 1558.52,2500.96 1559.58,2499.9 cw(c1555.34,2495.66) 1559.58,2491.42 ccw(c1563.83,2487.17) 1559.58,2482.93 1560.64,2481.87 ccw(c1564.89,2486.11) 1569.13,2481.87 cw(c1573.37,2477.63) 1577.62,2481.87 1578.68,2480.81 cw(c1574.43,2476.57) 1578.68,2472.32 ccw(c1582.92,2468.08) 1578.68,2463.84 1579.74,2462.78 ccw(c1583.98,2467.02) 1588.22,2462.78 cw(c1592.46,2458.54) 1596.71,2462.78 1597.77,2461.72 cw(c1593.53,2457.48) 1597.77,2453.23 ccw(c1602.01,2448.99) 1597.77,2444.75 1598.83,2443.69 ccw(c1603.07,2447.93) 1607.31,2443.69 cw(c1611.56,2439.44) 1615.8,2443.69 1616.86,2442.63 cw(c1612.62,2438.38) 1616.86,2434.14 ccw(c1621.1,2429.9) 1616.86,2425.66 1617.92,2424.59 ccw(c1622.16,2428.84) 1626.41,2424.59 cw(c1630.65,2420.35) 1634.89,2424.59 1635.95,2423.53 cw(c1631.71,2419.29) 1635.95,2415.05 ccw(c1640.19,2410.81) 1635.95,2406.56 1637.01,2405.5 ccw(c1641.25,2409.75) 1645.5,2405.5 cw(c1649.74,2401.26) 1653.98,2405.5 1655.04,2404.44 cw(c1650.8,2400.2) 1655.04,2395.96 ccw(c1659.29,2391.71) 1655.04,2387.47 1656.1,2386.41 ccw(c1660.35,2390.65) 1664.59,2386.41 cw(c1668.83,2382.17) 1673.07,2386.41 1674.14,2385.35 cw(c1669.89,2381.11) 1674.14,2376.86 ccw(c1678.38,2372.62) 1674.14,2368.38 1675.2,2367.32 ccw(c1679.44,2371.56) 1683.68,2367.32 1693.23,2357.77 1698,2353 1702.75,2353 1716.25,2353 cw(c1722.25,2353) 1722.25,2359 1723.75,2359 cw(c1723.75,2353) 1729.75,2353 ccw(c1735.75,2353) 1735.75,2347 1737.25,2347 ccw(c1737.25,2353) 1743.25,2353 cw(c1749.25,2353) 1749.25,2359 1750.75,2359 cw(c1750.75,2353) 1756.75,2353 ccw(c1762.75,2353) 1762.75,2347 1764.25,2347 ccw(c1764.25,2353) 1770.25,2353 cw(c1776.25,2353) 1776.25,2359 1777.75,2359 cw(c1777.75,2353) 1783.75,2353 ccw(c1789.75,2353) 1789.75,2347 1791.25,2347 ccw(c1791.25,2353) 1797.25,2353 cw(c1803.25,2353) 1803.25,2359 1804.75,2359 cw(c1804.75,2353) 1810.75,2353 ccw(c1816.75,2353) 1816.75,2347 1818.25,2347 ccw(c1818.25,2353) 1824.25,2353 cw(c1830.25,2353) 1830.25,2359 1831.75,2359 cw(c1831.75,2353) 1837.75,2353 ccw(c1843.75,2353) 1843.75,2347 1845.25,2347 ccw(c1845.25,2353) 1851.25,2353 cw(c1857.25,2353) 1857.25,2359 1858.75,2359 cw(c1858.75,2353) 1864.75,2353 ccw(c1870.75,2353) 1870.75,2347 1872.25,2347 ccw(c1872.25,2353) 1878.25,2353 cw(c1884.25,2353) 1884.25,2359 1885.75,2359 cw(c1885.75,2353) 1891.75,2353 ccw(c1897.75,2353) 1897.75,2347 1899.25,2347 ccw(c1899.25,2353) 1905.25,2353 cw(c1911.25,2353) 1911.25,2359 1912.75,2359 cw(c1912.75,2353) 1918.75,2353 ccw(c1924.75,2353) 1924.75,2347 1926.25,2347 ccw(c1926.25,2353) 1932.25,2353 cw(c1938.25,2353) 1938.25,2359 1939.75,2359 cw(c1939.75,2353) 1945.75,2353 ccw(c1951.75,2353) 1951.75,2347 1953.25,2347 ccw(c1953.25,2353) 1959.25,2353 cw(c1965.25,2353) 1965.25,2359 1966.75,2359 cw(c1966.75,2353) 1972.75,2353 ccw(c1978.75,2353) 1978.75,2347 1980.25,2347 ccw(c1980.25,2353) 1986.25,2353 cw(c1992.25,2353) 1992.25,2359 1993.75,2359 cw(c1993.75,2353) 1999.75,2353 ccw(c2005.75,2353) 2005.75,2347 2007.25,2347 ccw(c2007.25,2353) 2013.25,2353 cw(c2019.25,2353) 2019.25,2359 2020.75,2359 cw(c2020.75,2353) 2026.75,2353 ccw(c2032.75,2353) 2032.75,2347 2034.25,2347 ccw(c2034.25,2353) 2040.25,2353 cw(c2046.25,2353) 2046.25,2359 2047.75,2359 cw(c2047.75,2353) 2053.75,2353 ccw(c2059.75,2353) 2059.75,2347 2061.25,2347 ccw(c2061.25,2353) 2067.25,2353 cw(c2073.25,2353) 2073.25,2359 2074.75,2359 cw(c2074.75,2353) 2080.75,2353 ccw(c2086.75,2353) 2086.75,2347 2088.25,2347 ccw(c2088.25,2353) 2094.25,2353 cw(c2100.25,2353) 2100.25,2359 2101.75,2359 cw(c2101.75,2353) 2107.75,2353 ccw(c2113.75,2353) 2113.75,2347 2115.25,2347 ccw(c2115.25,2353) 2121.25,2353 cw(c2127.25,2353) 2127.25,2359 2128.75,2359 cw(c2128.75,2353) 2134.75,2353 ccw(c2140.75,2353) 2140.75,2347 2142.25,2347 ccw(c2142.25,2353) 2148.25,2353 cw(c2154.25,2353) 2154.25,2359 2155.75,2359 cw(c2155.75,2353) 2161.75,2353 ccw(c2167.75,2353) 2167.75,2347 2169.25,2347 ccw(c2169.25,2353) 2175.25,2353 cw(c2181.25,2353) 2181.25,2359 2182.75,2359 cw(c2182.75,2353) 2188.75,2353 2202.25,2353 2209,2353 2209.08,2352.92 2218.63,2343.37 ccw(c2222.87,2339.13) 2218.63,2334.88 2219.69,2333.82 ccw(c2223.93,2338.07) 2228.18,2333.82 cw(c2232.42,2329.58) 2236.66,2333.82 2237.72,2332.76 cw(c2233.48,2328.52) 2237.72,2324.28 ccw(c2241.96,2320.04) 2237.72,2315.79 2238.78,2314.73 ccw(c2243.02,2318.97) 2247.27,2314.73 cw(c2251.51,2310.49) 2255.75,2314.73 2256.81,2313.67 cw(c2252.57,2309.43) 2256.81,2305.19 ccw(c2261.06,2300.94) 2256.81,2296.7 2257.87,2295.64 ccw(c2262.12,2299.88) 2266.36,2295.64 cw(c2270.6,2291.4) 2274.84,2295.64 2275.91,2294.58 cw(c2271.66,2290.34) 2275.91,2286.09 ccw(c2280.15,2281.85) 2275.91,2277.61 2276.97,2276.55 ccw(c2281.21,2280.79) 2285.45,2276.55 cw(c2289.69,2272.31) 2293.94,2276.55 2295,2275.49 cw(c2290.75,2271.25) 2295,2267 ccw(c2299.24,2262.76) 2295,2258.52 2296.06,2257.46 ccw(c2300.3,2261.7) 2304.54,2257.46 cw(c2308.79,2253.21) 2313.03,2257.46 2314.09,2256.4 cw(c2309.85,2252.15) 2314.09,2247.91 ccw(c2318.33,2243.67) 2314.09,2239.43 2315.15,2238.36 ccw(c2319.39,2242.61) 2323.64,2238.36 cw(c2327.88,2234.12) 2332.12,2238.36 2333.18,2237.3 cw(c2328.94,2233.06) 2333.18,2228.82 ccw(c2337.42,2224.58) 2333.18,2220.33 2334.24,2219.27 ccw(c2338.48,2223.52) 2342.73,2219.27 2347.5,2214.5 2360.99,2201.01 U2.39@2360.99,1802.78
HD24: P3.43 U2.40 | length 2220.5
  Top Layer w6: P3.43@1362,2933 1415,2880 1415,2579 1436,2558 1592.14,2401.86 cw(c1590.72,2400.45) 1592.14,2399.03 ccw(c1597.09,2394.08) 1592.14,2389.13 ccw(c1597.09,2394.08) 1602.04,2389.13 1603.45,2390.55 1604.87,2391.96 cw(c1609.82,2387.01) 1614.77,2391.96 cw(c1609.82,2387.01) 1614.77,2382.06 1613.35,2380.65 1611.94,2379.23 ccw(c1616.89,2374.28) 1611.94,2369.33 ccw(c1616.89,2374.28) 1621.84,2369.33 1623.25,2370.75 1624.67,2372.16 cw(c1629.62,2367.21) 1634.56,2372.16 cw(c1629.62,2367.21) 1634.56,2362.26 1633.15,2360.85 1631.74,2359.43 ccw(c1636.69,2354.49) 1631.74,2349.54 ccw(c1636.69,2354.49) 1641.64,2349.54 cw(c1643.05,2348.12) 1644.46,2349.54 1648,2346 1663,2331 1683,2331 ccw(c1689,2331) 1689,2325 1691,2325 ccw(c1691,2331) 1697,2331 cw(c1703,2331) 1703,2337 1705,2337 cw(c1705,2331) 1711,2331 ccw(c1717,2331) 1717,2325 1719,2325 ccw(c1719,2331) 1725,2331 cw(c1731,2331) 1731,2337 1733,2337 cw(c1733,2331) 1739,2331 ccw(c1745,2331) 1745,2325 1747,2325 ccw(c1747,2331) 1753,2331 cw(c1759,2331) 1759,2337 1761,2337 cw(c1761,2331) 1767,2331 ccw(c1773,2331) 1773,2325 1775,2325 ccw(c1775,2331) 1781,2331 cw(c1787,2331) 1787,2337 1789,2337 cw(c1789,2331) 1795,2331 ccw(c1801,2331) 1801,2325 1803,2325 ccw(c1803,2331) 1809,2331 cw(c1815,2331) 1815,2337 1817,2337 cw(c1817,2331) 1823,2331 ccw(c1829,2331) 1829,2325 1831,2325 ccw(c1831,2331) 1837,2331 cw(c1843,2331) 1843,2337 1845,2337 cw(c1845,2331) 1851,2331 ccw(c1857,2331) 1857,2325 1859,2325 ccw(c1859,2331) 1865,2331 cw(c1871,2331) 1871,2337 1873,2337 cw(c1873,2331) 1879,2331 ccw(c1885,2331) 1885,2325 1887,2325 ccw(c1887,2331) 1893,2331 cw(c1899,2331) 1899,2337 1901,2337 cw(c1901,2331) 1907,2331 ccw(c1913,2331) 1913,2325 1915,2325 ccw(c1915,2331) 1921,2331 cw(c1927,2331) 1927,2337 1929,2337 cw(c1929,2331) 1935,2331 ccw(c1941,2331) 1941,2325 1943,2325 ccw(c1943,2331) 1949,2331 cw(c1955,2331) 1955,2337 1957,2337 cw(c1957,2331) 1963,2331 ccw(c1969,2331) 1969,2325 1971,2325 ccw(c1971,2331) 1977,2331 cw(c1983,2331) 1983,2337 1985,2337 cw(c1985,2331) 1991,2331 ccw(c1997,2331) 1997,2325 1999,2325 ccw(c1999,2331) 2005,2331 cw(c2011,2331) 2011,2337 2013,2337 cw(c2013,2331) 2019,2331 ccw(c2025,2331) 2025,2325 2027,2325 ccw(c2027,2331) 2033,2331 cw(c2039,2331) 2039,2337 2041,2337 cw(c2041,2331) 2047,2331 ccw(c2053,2331) 2053,2325 2055,2325 ccw(c2055,2331) 2061,2331 cw(c2067,2331) 2067,2337 2069,2337 cw(c2069,2331) 2075,2331 ccw(c2081,2331) 2081,2325 2083,2325 ccw(c2083,2331) 2089,2331 cw(c2095,2331) 2095,2337 2097,2337 cw(c2097,2331) 2103,2331 ccw(c2109,2331) 2109,2325 2111,2325 ccw(c2111,2331) 2117,2331 cw(c2123,2331) 2123,2337 2125,2337 cw(c2125,2331) 2131,2331 ccw(c2137,2331) 2137,2325 2139,2325 ccw(c2139,2331) 2145,2331 cw(c2151,2331) 2151,2337 2153,2337 cw(c2153,2331) 2159,2331 2180,2331 2193.86,2317.14 ccw(c2198.1,2312.9) 2193.86,2308.66 2195.27,2307.24 ccw(c2199.51,2311.49) 2203.76,2307.24 cw(c2208,2303) 2212.24,2307.24 2213.66,2305.83 cw(c2209.41,2301.59) 2213.66,2297.34 ccw(c2217.9,2293.1) 2213.66,2288.86 2215.07,2287.44 ccw(c2219.31,2291.69) 2223.56,2287.44 cw(c2227.8,2283.2) 2232.04,2287.44 2233.45,2286.03 cw(c2229.21,2281.79) 2233.45,2277.55 ccw(c2237.7,2273.3) 2233.45,2269.06 2234.87,2267.65 ccw(c2239.11,2271.89) 2243.35,2267.65 cw(c2247.6,2263.4) 2251.84,2267.65 2253.25,2266.23 cw(c2249.01,2261.99) 2253.25,2257.75 ccw(c2257.5,2253.5) 2253.25,2249.26 2254.67,2247.85 ccw(c2258.91,2252.09) 2263.15,2247.85 cw(c2267.4,2243.6) 2271.64,2247.85 2273.05,2246.43 cw(c2268.81,2242.19) 2273.05,2237.95 ccw(c2277.3,2233.7) 2273.05,2229.46 2274.47,2228.05 ccw(c2278.71,2232.29) 2282.95,2228.05 cw(c2287.19,2223.81) 2291.44,2228.05 2292.85,2226.63 cw(c2288.61,2222.39) 2292.85,2218.15 ccw(c2297.09,2213.91) 2292.85,2209.66 2294.27,2208.25 ccw(c2298.51,2212.49) 2302.75,2208.25 cw(c2306.99,2204.01) 2311.24,2208.25 2312.65,2206.83 cw(c2308.41,2202.59) 2312.65,2198.35 ccw(c2316.89,2194.11) 2312.65,2189.86 2314.06,2188.45 ccw(c2318.31,2192.69) 2322.55,2188.45 2345.24,2165.76 U2.40@2345.24,1802.78
HD25: P3.44 U2.41 | length 2222.1
  Top Layer w6: P3.44@1362,2833 1362,2572 1630,2304 1819.5,2304 cw(c1819.5,2301.75) 1821.75,2301.75 ccw(c1828,2301.75) 1828,2295.5 ccw(c1828,2301.75) 1834.25,2301.75 1834.25,2304 1834.25,2306.25 cw(c1840.5,2306.25) 1840.5,2312.5 cw(c1840.5,2306.25) 1846.75,2306.25 1846.75,2304 1846.75,2301.75 ccw(c1853,2301.75) 1853,2295.5 ccw(c1853,2301.75) 1859.25,2301.75 1859.25,2304 1859.25,2306.25 cw(c1865.5,2306.25) 1865.5,2312.5 cw(c1865.5,2306.25) 1871.75,2306.25 1871.75,2304 1871.75,2301.75 ccw(c1878,2301.75) 1878,2295.5 ccw(c1878,2301.75) 1884.25,2301.75 1884.25,2304 1884.25,2306.25 cw(c1890.5,2306.25) 1890.5,2312.5 cw(c1890.5,2306.25) 1896.75,2306.25 1896.75,2304 1896.75,2301.75 ccw(c1903,2301.75) 1903,2295.5 ccw(c1903,2301.75) 1909.25,2301.75 1909.25,2304 1909.25,2306.25 cw(c1915.5,2306.25) 1915.5,2312.5 cw(c1915.5,2306.25) 1921.75,2306.25 1921.75,2304 1921.75,2301.75 ccw(c1928,2301.75) 1928,2295.5 ccw(c1928,2301.75) 1934.25,2301.75 1934.25,2304 1934.25,2306.25 cw(c1940.5,2306.25) 1940.5,2312.5 cw(c1940.5,2306.25) 1946.75,2306.25 1946.75,2304 1946.75,2301.75 ccw(c1953,2301.75) 1953,2295.5 ccw(c1953,2301.75) 1959.25,2301.75 1959.25,2304 1959.25,2306.25 cw(c1965.5,2306.25) 1965.5,2312.5 cw(c1965.5,2306.25) 1971.75,2306.25 1971.75,2304 1971.75,2301.75 ccw(c1978,2301.75) 1978,2295.5 ccw(c1978,2301.75) 1984.25,2301.75 1984.25,2304 1984.25,2306.25 cw(c1990.5,2306.25) 1990.5,2312.5 cw(c1990.5,2306.25) 1996.75,2306.25 1996.75,2304 1996.75,2301.75 ccw(c2003,2301.75) 2003,2295.5 ccw(c2003,2301.75) 2009.25,2301.75 2009.25,2304 2009.25,2306.25 cw(c2015.5,2306.25) 2015.5,2312.5 cw(c2015.5,2306.25) 2021.75,2306.25 2021.75,2304 2021.75,2301.75 ccw(c2028,2301.75) 2028,2295.5 ccw(c2028,2301.75) 2034.25,2301.75 2034.25,2304 2034.25,2306.25 cw(c2040.5,2306.25) 2040.5,2312.5 cw(c2040.5,2306.25) 2046.75,2306.25 2046.75,2304 2046.75,2301.75 ccw(c2053,2301.75) 2053,2295.5 ccw(c2053,2301.75) 2059.25,2301.75 2059.25,2304 2059.25,2306.25 cw(c2065.5,2306.25) 2065.5,2312.5 cw(c2065.5,2306.25) 2071.75,2306.25 2071.75,2304 2071.75,2301.75 ccw(c2078,2301.75) 2078,2295.5 ccw(c2078,2301.75) 2084.25,2301.75 2084.25,2304 2084.25,2306.25 cw(c2090.5,2306.25) 2090.5,2312.5 cw(c2090.5,2306.25) 2096.75,2306.25 2096.75,2304 2096.75,2301.75 ccw(c2103,2301.75) 2103,2295.5 ccw(c2103,2301.75) 2109.25,2301.75 2109.25,2304 2109.25,2306.25 cw(c2115.5,2306.25) 2115.5,2312.5 cw(c2115.5,2306.25) 2121.75,2306.25 2121.75,2304 2121.75,2301.75 ccw(c2128,2301.75) 2128,2295.5 ccw(c2128,2301.75) 2134.25,2301.75 cw(c2136.5,2301.75) 2136.5,2304 2146.75,2304 2153,2304 2157.14,2299.86 2164.39,2292.61 ccw(c2165.98,2294.2) 2167.57,2292.61 cw(c2171.99,2288.19) 2176.41,2292.61 cw(c2171.99,2288.19) 2176.41,2283.77 2174.82,2282.18 2173.23,2280.59 ccw(c2177.64,2276.17) 2173.23,2271.75 ccw(c2177.64,2276.17) 2182.06,2271.75 2183.65,2273.35 2185.25,2274.94 cw(c2189.67,2270.52) 2194.08,2274.94 cw(c2189.67,2270.52) 2194.08,2266.1 2192.49,2264.51 2190.9,2262.92 ccw(c2195.32,2258.5) 2190.9,2254.08 ccw(c2195.32,2258.5) 2199.74,2254.08 2201.33,2255.67 2202.92,2257.26 cw(c2207.34,2252.84) 2211.76,2257.26 cw(c2207.34,2252.84) 2211.76,2248.42 2210.17,2246.83 2208.58,2245.24 ccw(c2213,2240.82) 2208.58,2236.4 ccw(c2213,2240.82) 2217.42,2236.4 2219.01,2237.99 2220.6,2239.58 cw(c2225.02,2235.16) 2229.44,2239.58 cw(c2225.02,2235.16) 2229.44,2230.74 2227.85,2229.15 2226.26,2227.56 ccw(c2230.68,2223.14) 2226.26,2218.72 ccw(c2230.68,2223.14) 2235.1,2218.72 2236.69,2220.31 2238.28,2221.9 cw(c2242.7,2217.48) 2247.12,2221.9 cw(c2242.7,2217.48) 2247.12,2213.06 2245.53,2211.47 2243.94,2209.88 ccw(c2248.36,2205.46) 2243.94,2201.04 ccw(c2248.36,2205.46) 2252.77,2201.04 2254.37,2202.63 2255.96,2204.23 cw(c2260.38,2199.81) 2264.8,2204.23 cw(c2260.38,2199.81) 2264.8,2195.39 2263.2,2193.8 2261.61,2192.2 ccw(c2266.03,2187.79) 2261.61,2183.37 ccw(c2266.03,2187.79) 2270.45,2183.37 2272.04,2184.96 2273.63,2186.55 cw(c2278.05,2182.13) 2282.47,2186.55 cw(c2278.05,2182.13) 2282.47,2177.71 2280.88,2176.12 2279.29,2174.53 ccw(c2283.71,2170.11) 2279.29,2165.69 ccw(c2283.71,2170.11) 2288.13,2165.69 2289.72,2167.28 2291.31,2168.87 cw(c2295.73,2164.45) 2300.15,2168.87 cw(c2295.73,2164.45) 2300.15,2160.03 2298.56,2158.44 2296.97,2156.85 ccw(c2301.39,2152.43) 2296.97,2148.01 ccw(c2301.39,2152.43) 2305.81,2148.01 2307.4,2149.6 2308.99,2151.19 cw(c2313.41,2146.77) 2317.83,2151.19 cw(c2313.41,2146.77) 2317.83,2142.35 ccw(c2319.42,2140.76) 2317.83,2139.17 2325.08,2131.92 2329.5,2127.5 U2.41@2329.5,1802.78

## Text inside footprints (layer, text, board x,y; h text height)
D2: Top Overlay "+" at 128.01,768.56 h40 r90
D3: Top Overlay "+" at 367.55,2292.99 h40 r90
D4: Top Overlay "+" at 367.55,2444.99 h40 r90
D5: Top Overlay "+" at 367.55,2596.99 h40 r90